# Altium PCB RP2040Breakout.PcbDoc
Units mm, origin at the board's own origin, x right, y up, seen from the top; angles counter-clockwise.
Board outline 60 x 60 mm, 2 copper layers (Top Layer, Bottom Layer), stack 1.57 mm thick; 62 components, 34 nets, 233 pads, 88 vias.
Unrouted connection lines stored in the file: 1.
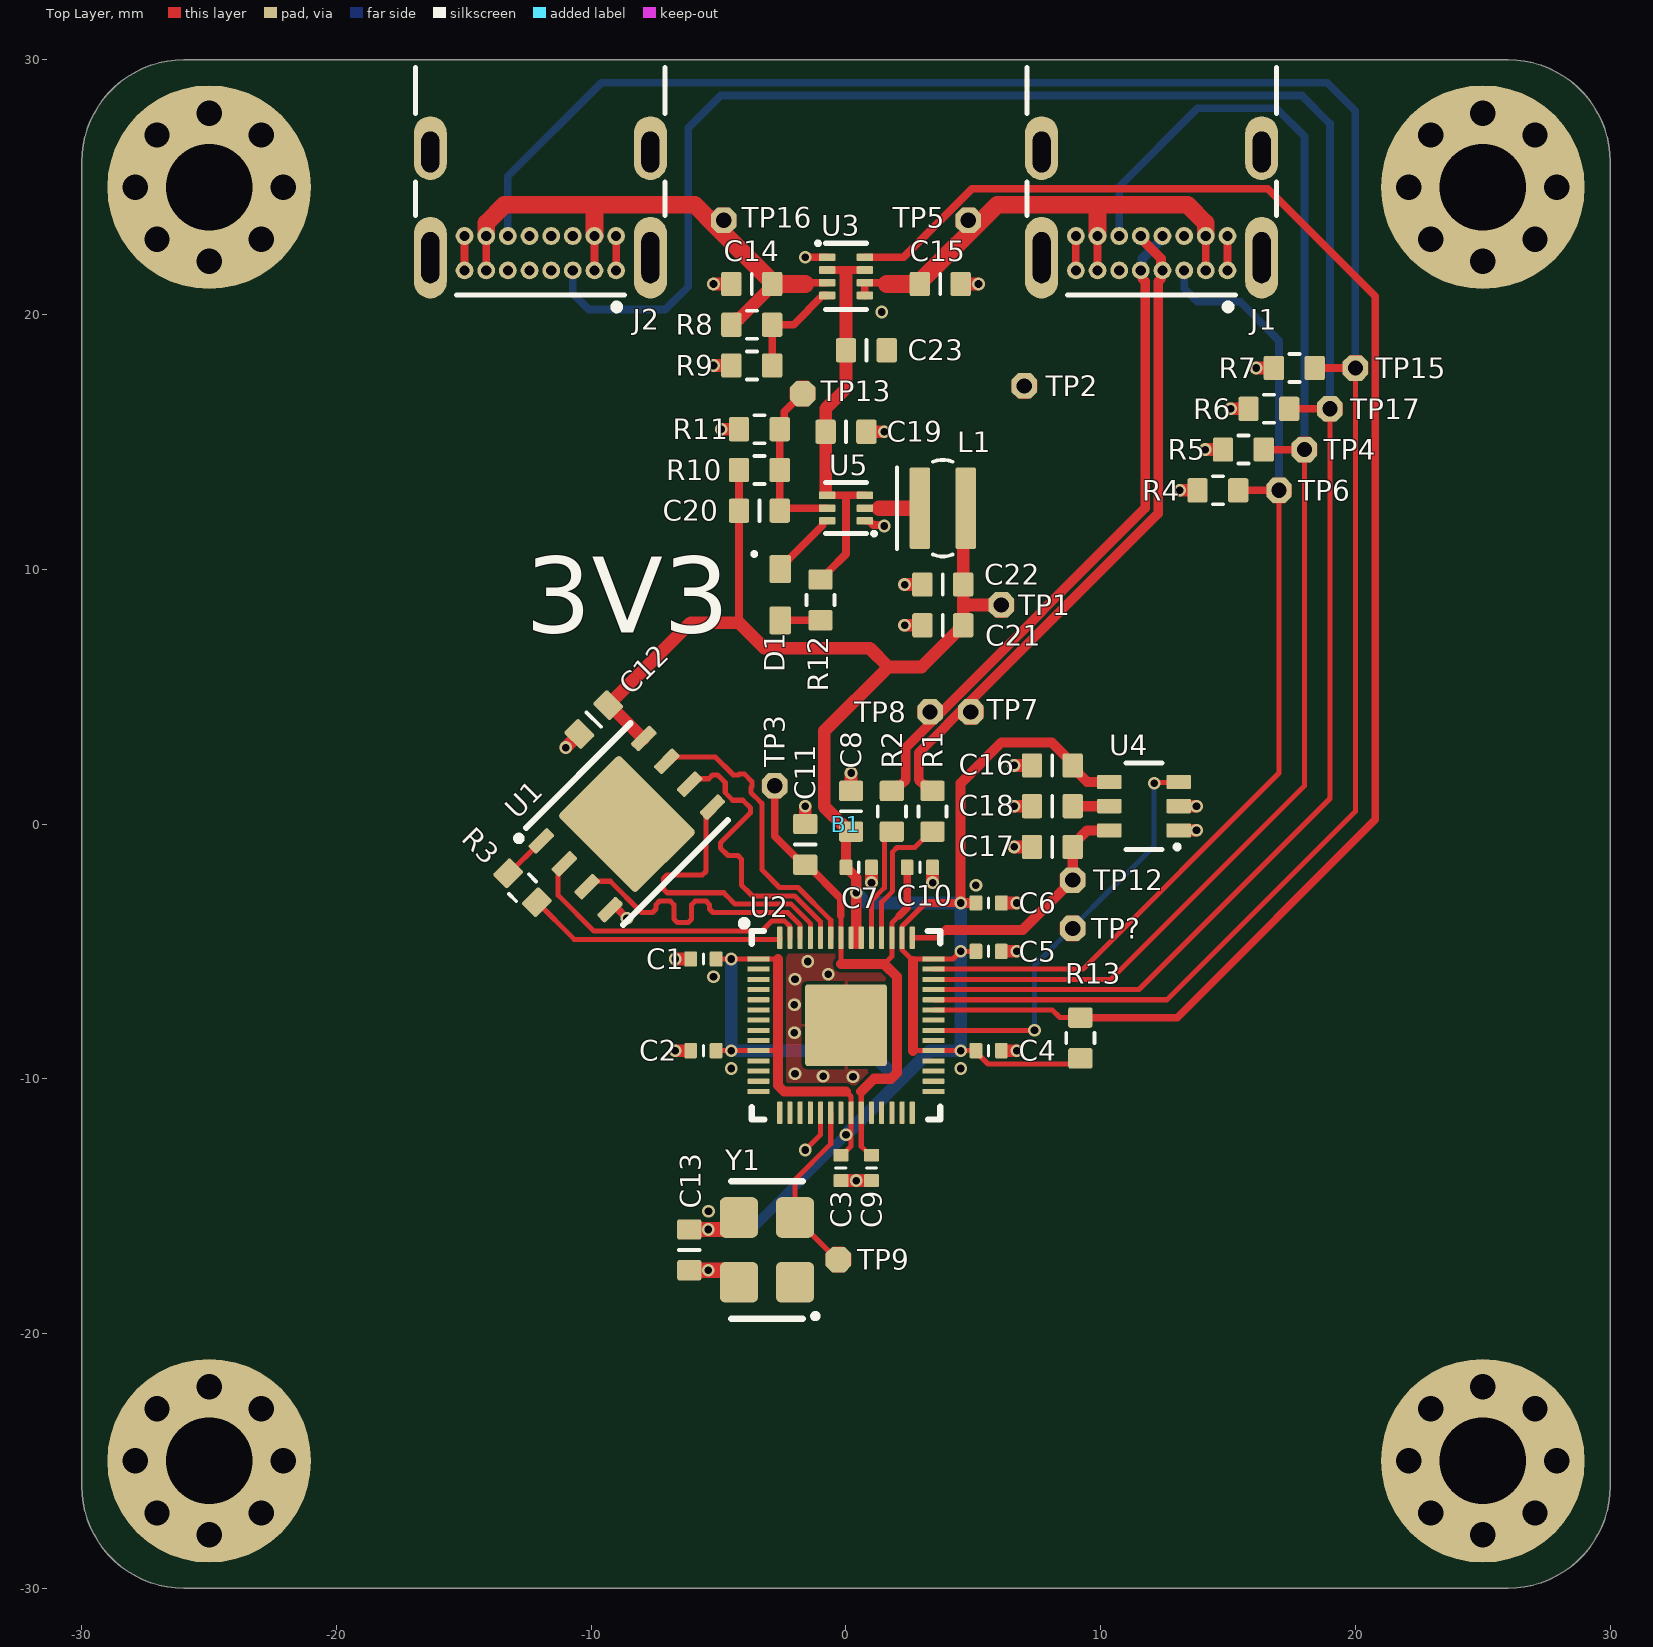
[diagram p0: Top Layer view]
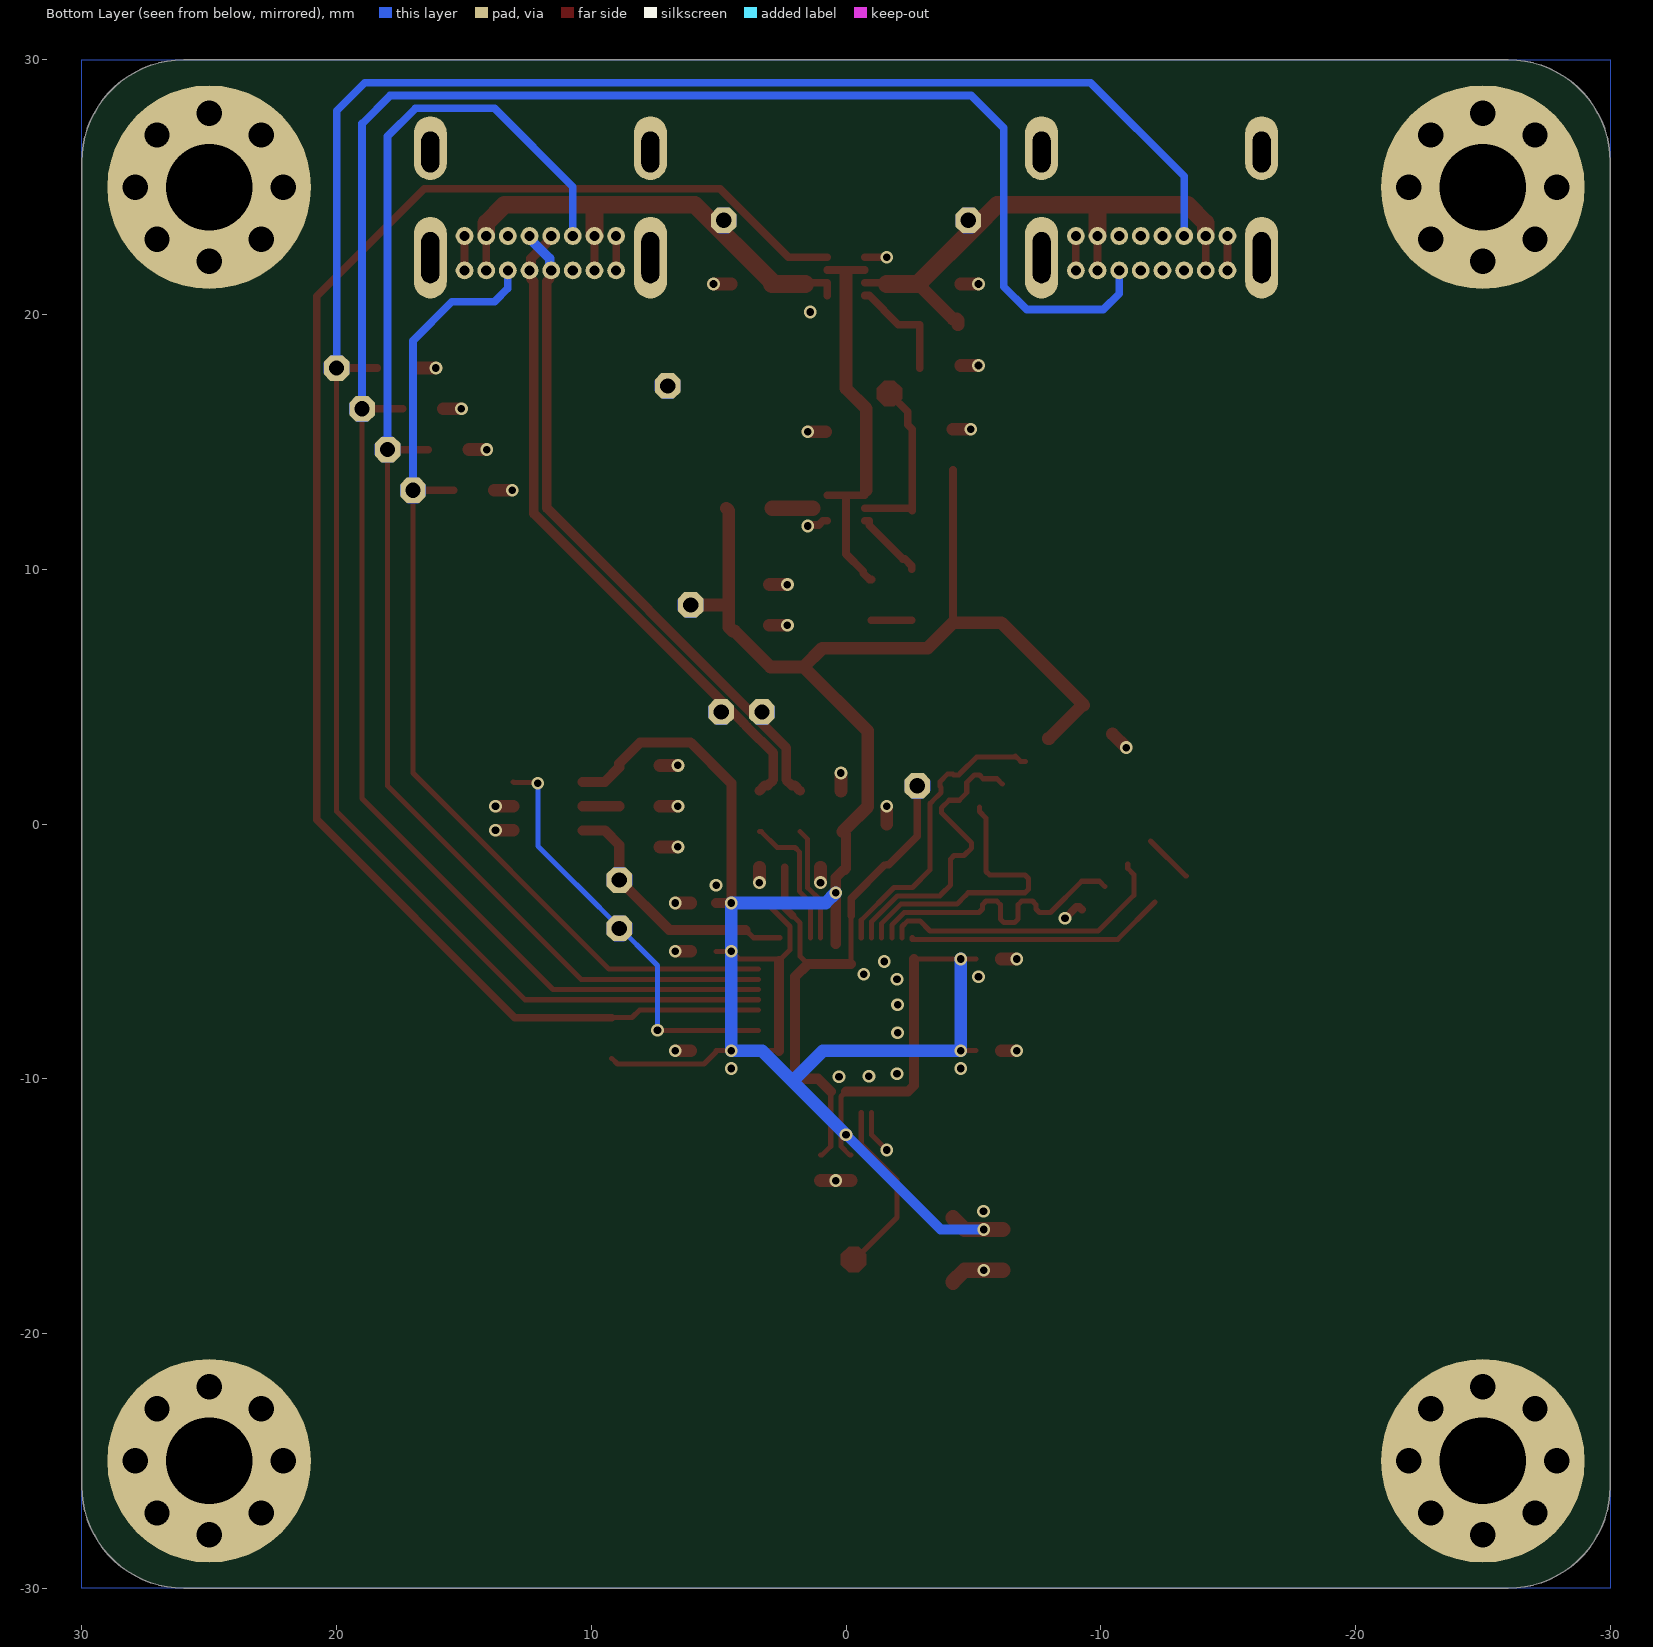
[diagram p1: Bottom Layer view, seen from below]
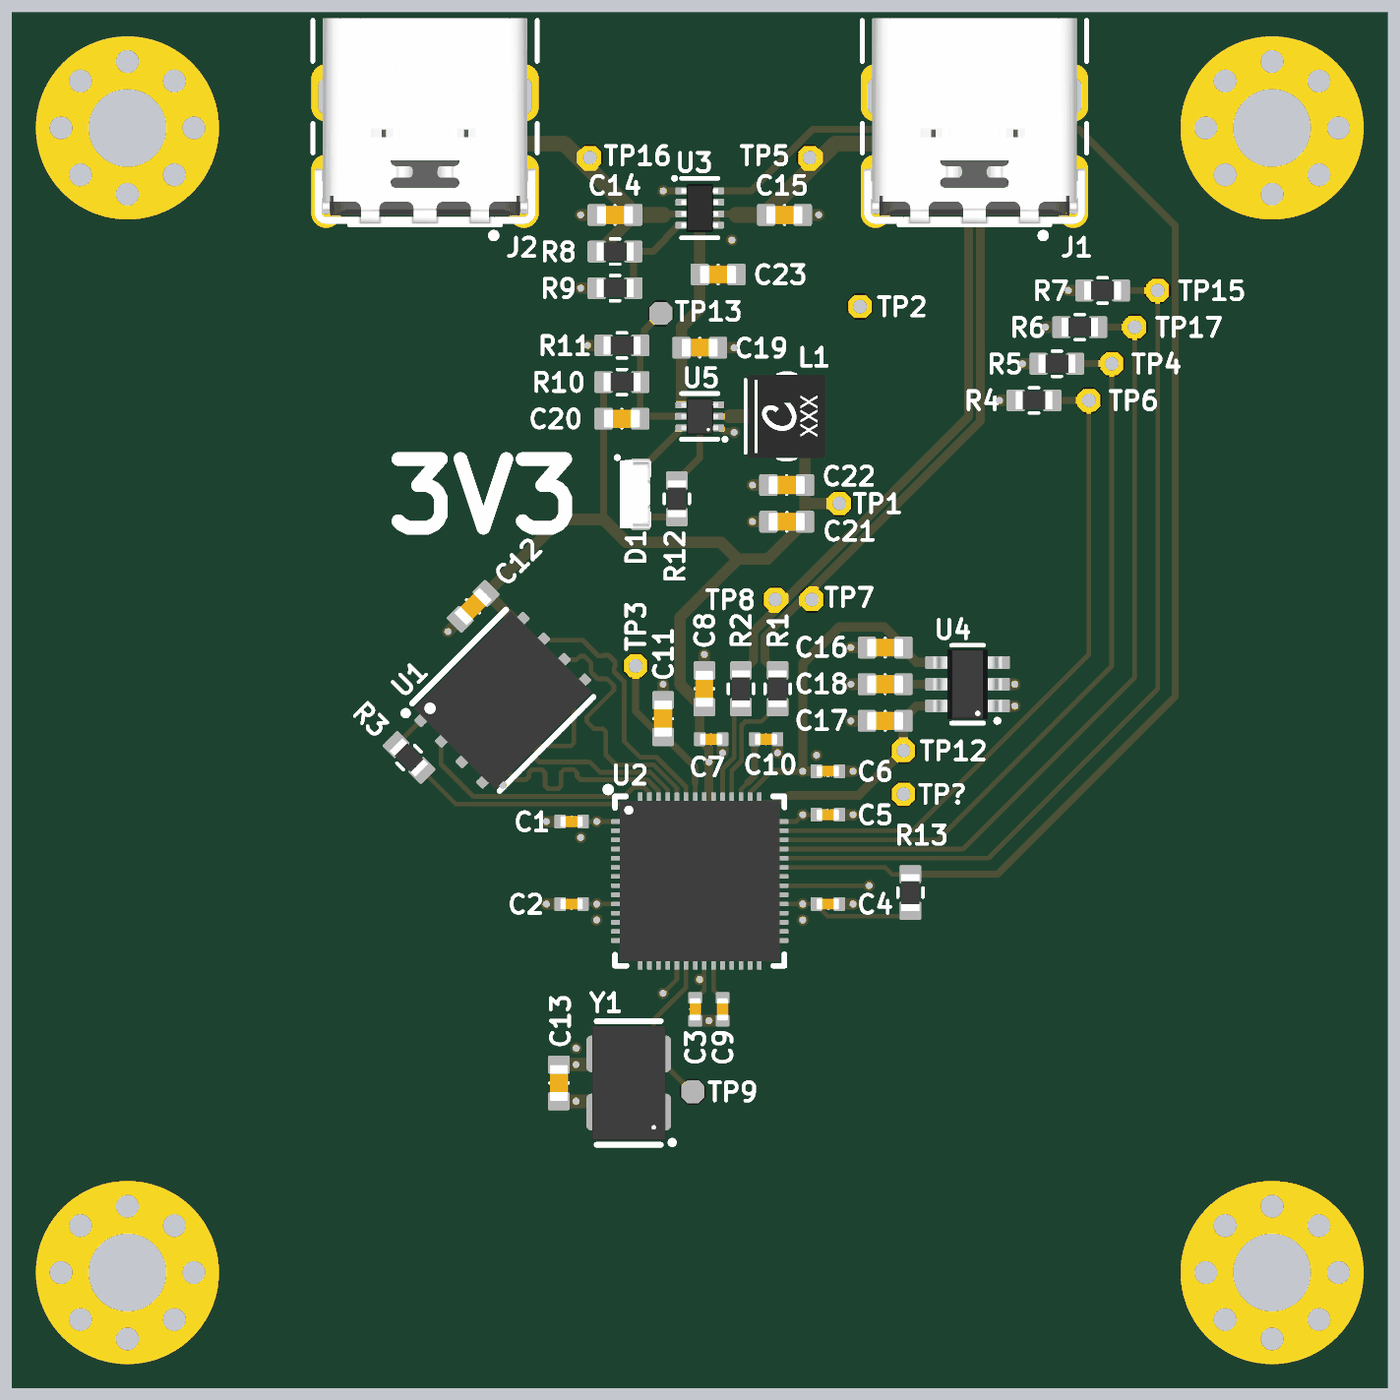
[diagram p2: 3D render of the assembled board from above, using the file's embedded part models]

## Layer stack, top to bottom
Top Solder: solder mask 0.0127, Solder Resist, Dk 3.8
Top Layer: signal copper 0.035
Dielectric 1: dielectric 1.5, FR-4, Dk 4.5
Bottom Layer: signal copper 0.035
Bottom Solder: solder mask 0.0127, Solder Resist, Dk 3.8

## Board outline
-30,-26 -30,26 cw(c-26,26) -26,30 26,30 cw(c26,26) 30,26 30,-26 cw(c26,-26) 26,-30 -26,-30 cw(c-26,-26)

## Design rules (kind name [scope] priority, off if disabled: settings)
BoardOutlineClearance [All] p1: gap=0.2 ignorepadtopadclearanceinfootprint=FALSE
Clearance [All] p1: gap=0.127 ignorepadtopadclearanceinfootprint=FALSE except(0.25: Arc-Hole Track-Hole SMDPad-Hole THPad-Hole Via-Hole Fill-Hole Poly-Hole Region-Hole Text-Hole)
ComponentClearance [NOT InComponent('B1') vs NOT InComponent('B1')] p1: gap=0.127 collisioncheckmode=3 verticalgap=0.127 showdistances=TRUE
DiffPairsRouting [All] p1: maxlimit=0.254 minlimit=0.127 mostfreqgap=0.127 toplayer_minwidth=0.127 toplayer_maxwidth=25.4 toplayer_prefwidth=0.127 bottomlayer_minwidth=0.127 bottomlayer_maxwidth=25.4 bottomlayer_prefwidth=0.127 maxuncoupledlength=12.7
DiffPairsRouting DiffPairsRouting_USB [InDifferentialPair('USBD')] p2: maxlimit=0.2 minlimit=0.2 mostfreqgap=0.2 toplayer_minwidth=0.766 toplayer_maxwidth=0.766 toplayer_prefwidth=0.766 bottomlayer_minwidth=0.766 bottomlayer_maxwidth=0.766 bottomlayer_prefwidth=0.766 impedanceprofiledriven=TRUE impedanceprofileid={7DB69605-737D-4C2B-A8A7-E868D9FD1BFF} impedanceprofilevalue=90.000000 maxuncoupledlength=12.7
Height [All] p1: minheight=0 maxheight=1816.048 prefheight=12.7
HoleSize [All] p1: absolutevalues=TRUE maxlimit=6.3 minlimit=0.3 maxpercent=80.000 minpercent=20.000
HoleToHoleClearance [All] p1: gap=0.25 allowstackedmicrovias=FALSE
MinimumAnnularRing [All] p1: minimumring=0.15
MinimumSolderMaskSliver [All] p1: minsoldermaskwidth=0
PlaneClearance [All] p1: clearance=0.127
PlaneConnect PlaneConnectPowerPads [InPadClass('PowerPads')] p1: planeconnectstyle=Direct reliefexpansion=0.508 reliefentries=4 reliefconductorwidth=0.254 reliefairgap=0.254
PlaneConnect [All] p2: pad.planeconnectstyle=Relief pad.reliefexpansion=0.3 pad.reliefentries=4 pad.reliefconductorwidth=0.127 pad.reliefairgap=0.127 via.planeconnectstyle=Direct via.reliefexpansion=0.3 via.reliefentries=4 via.reliefconductorwidth=0.127 via.reliefairgap=0.127
PolygonConnect PolygonConnectPowerPads [All vs (InPadClass('PowerPads'))] p1: connectstyle=Direct reliefconductorwidth=0.254 reliefentries=4 polygonreliefangle="90 Angle" airgapwidth=0.254
PolygonConnect [All] p2: thpad.connectstyle=Relief thpad.reliefconductorwidth=0.127 thpad.reliefentries=4 thpad.polygonreliefangle="90 Angle" thpad.airgapwidth=0.127 smdpad.connectstyle=Relief smdpad.reliefconductorwidth=0.127 smdpad.reliefentries=4 smdpad.polygonreliefangle="90 Angle" smdpad.airgapwidth=0.127 via.connectstyle=Direct via.reliefconductorwidth=0.127 via.reliefentries=4 via.polygonreliefangle="90 Angle" via.airgapwidth=0.127
RoutingVias [All] p1: holewidth=0.3 width=0.5 viastyle="Through Hole" minholewidth=0.3 minwidth=0.5 maxholewidth=0.6 maxwidth=6.6
SilkToSilkClearance [All] p1: silktosilkclearance=0
SilkToSolderMaskClearance [IsPad] p1: minsilkscreentomaskgap=0.127 clearancetoexposedcopper=TRUE
SolderMaskExpansion SolderMaskExpansion_Via [IsVia] p1: expansion=0.075 istentingtop=TRUE
SolderMaskExpansion [NOT IsVia] p2: expansion=0.075 istentingtop=FALSE
Width [All] p1: maxlimit=25.4 minlimit=0.127 preferedwidth=0.127 minimp=50.000000 maximp=50.000000 favimp=50.000000
20 further rules are at their usual default settings.

## Classes and differential pairs
differential pair RPD: +RPD_P -RPD_N
differential pair USBD: +USBD_P -USBD_N

## Components (designator, comment, footprint, x,y, rotation, side; value= is the part's Value field where it differs from the comment)
B1 "Board Outline Square" PCB_OUTLINE_SQUARE 0,0 r0 top locked
C1 "Capacitor - Ceramic - Generic" CAPACITOR_0402(1005)_GENERIC -5.6,-5.3 r0 top value=100nF
C2 "Capacitor - Ceramic - Generic" CAPACITOR_0402(1005)_GENERIC -5.6,-8.9 r0 top value=100nF
C3 "Capacitor - Ceramic - Generic" CAPACITOR_0402(1005)_GENERIC -0.2,-13.5 r90 top value=100nF
C4 "Capacitor - Ceramic - Generic" CAPACITOR_0402(1005)_GENERIC 5.6,-8.9 r180 top value=100nF
C5 "Capacitor - Ceramic - Generic" CAPACITOR_0402(1005)_GENERIC 5.6,-5 r180 top value=100nF
C6 "Capacitor - Ceramic - Generic" CAPACITOR_0402(1005)_GENERIC 5.6,-3.1 r180 top value=100nF
C7 "Capacitor - Ceramic - Generic" CAPACITOR_0402(1005)_GENERIC 0.5,-1.7 r180 top value=100nF
C8 "Capacitor - Ceramic - Generic" CAPACITOR_0603(1608)_GENERIC 0.2,0.5 r270 top value=1uF
C9 "Capacitor - Ceramic - Generic" CAPACITOR_0402(1005)_GENERIC 1,-13.5 r90 top value=100nF
C10 "Capacitor - Ceramic - Generic" CAPACITOR_0402(1005)_GENERIC 2.9,-1.7 r180 top value=100nF
C11 "Capacitor - Ceramic - Generic" CAPACITOR_0603(1608)_GENERIC -1.6,-0.8 r270 top value=1uF
C12 "Capacitor - Ceramic - Generic" CAPACITOR_0603(1608)_GENERIC -9.9,4.1 r225 top value=100nF
C13 "Capacitor - Ceramic - Generic" CAPACITOR_0603(1608)_GENERIC -6.152,-16.719 r270 top value=100nF
C14 "Capacitor - Ceramic - Generic" CAPACITOR_0603(1608)_GENERIC -3.7,21.2 r0 top value=1uF
C15 "Capacitor - Ceramic - Generic" CAPACITOR_0603(1608)_GENERIC 3.7,21.2 r180 top value=1uF
C16 "Capacitor - Ceramic - Generic" CAPACITOR_0603(1608)_GENERIC 8.1,2.3 r180 top value=100nF
C17 "Capacitor - Ceramic - Generic" CAPACITOR_0603(1608)_GENERIC 8.1,-0.9 r0 top value=1uF
C18 "Capacitor - Ceramic - Generic" CAPACITOR_0603(1608)_GENERIC 8.1,0.7 r0 top value=1uF
C19 "Capacitor - Ceramic - Generic" CAPACITOR_0603(1608)_GENERIC 0,15.4 r0 top value=4.7uF
C20 "Capacitor - Ceramic - Generic" CAPACITOR_0603(1608)_GENERIC -3.4,12.3 r180 top value=120pF
C21 "Capacitor - Ceramic - Generic" CAPACITOR_0603(1608)_GENERIC 3.8,7.8 r0 top value=10uF
C22 "Capacitor - Ceramic - Generic" CAPACITOR_0603(1608)_GENERIC 3.8,9.4 r0 top value=10uF
C23 "Capacitor - Ceramic - Generic" CAPACITOR_0603(1608)_GENERIC 0.8,18.6 r180 top value=10uF
D1 "155301BS73100" WL-SMSW_3014_WURTH -2.8,9 r270 top
J1 "2137160001" CONN_PORT_USB-C_MOLEX-2137160001 12,25.3 r180 top
J2 "2137160001" CONN_PORT_USB-C_MOLEX-2137160001 -12,25.3 r180 top
L1 "Inductor - Ferrite Core - Generic" XGL3512_COILCRAFT 3.8,12.4 r90 top value=1uH
R1 "Resistor - Fixed - Generic" RESISTOR_0603(1608)_GENERIC 3.4,0.5 r270 top value=27R
R2 "Resistor - Fixed - Generic" RESISTOR_0603(1608)_GENERIC 1.8,0.5 r270 top value=27R
R3 "Resistor - Fixed - Generic" RESISTOR_0603(1608)_GENERIC -12.7,-2.5 r315 top value=1kR
R4 "Resistor - Fixed - Generic" RESISTOR_0603(1608)_GENERIC 14.6,13.1 r180 top value=5.1kR
R5 "Resistor - Fixed - Generic" RESISTOR_0603(1608)_GENERIC 15.6,14.7 r180 top value=5.1kR
R6 "Resistor - Fixed - Generic" RESISTOR_0603(1608)_GENERIC 16.6,16.3 r180 top value=5.1kR
R7 "Resistor - Fixed - Generic" RESISTOR_0603(1608)_GENERIC 17.6,17.9 r180 top value=5.1kR
R8 "Resistor - Fixed - Generic" RESISTOR_0603(1608)_GENERIC -3.7,19.6 r0 top value=36kR
R9 "Resistor - Fixed - Generic" RESISTOR_0603(1608)_GENERIC -3.7,18 r0 top value=10kR
R10 "Resistor - Fixed - Generic" RESISTOR_0603(1608)_GENERIC -3.4,13.9 r0 top value=450kR
R11 "Resistor - Fixed - Generic" RESISTOR_0603(1608)_GENERIC -3.4,15.5 r180 top value=100kR
R12 "Resistor - Fixed - Generic" RESISTOR_0603(1608)_GENERIC -1,8.8 r90 top value=2.2kR
R13 "Resistor - Fixed - Generic" RESISTOR_0603(1608)_GENERIC 9.2,-8.4 r270 top value=10kR
TP1 "Test Point - THT" TESTPOINT_THT_OCTAGON 6.1,8.6 r90 top
TP2 "Test Point - THT" TESTPOINT_THT_OCTAGON 7,17.2 r90 top
TP3 "Test Point - THT" TESTPOINT_THT_OCTAGON -2.8,1.5 r90 top
TP4 "Test Point - THT" TESTPOINT_THT_OCTAGON 18,14.7 r90 top
TP5 "Test Point - THT" TESTPOINT_THT_OCTAGON 4.8,23.7 r90 top
TP6 "Test Point - THT" TESTPOINT_THT_OCTAGON 17,13.1 r90 top
TP7 "Test Point - THT" TESTPOINT_THT_OCTAGON 4.9,4.4 r90 top
TP8 "Test Point - THT" TESTPOINT_THT_OCTAGON 3.3,4.4 r90 top
TP9 "Test Point - SMT" TESTPOINT_SMT_OCTAGON -0.3,-17.1 r90 top
TP12 "Test Point - THT" TESTPOINT_THT_OCTAGON 8.9,-2.2 r90 top
TP13 "Test Point - SMT" TESTPOINT_SMT_OCTAGON -1.7,16.9 r90 top
TP15 "Test Point - THT" TESTPOINT_THT_OCTAGON 20,17.9 r90 top
TP16 "Test Point - THT" TESTPOINT_THT_OCTAGON -4.8,23.7 r90 top
TP17 "Test Point - THT" TESTPOINT_THT_OCTAGON 19,16.3 r90 top
TP? "Test Point - THT" TESTPOINT_THT_OCTAGON 8.9,-4.1 r90 top
U1 "W25Q128JV" WSON-8(6x5mm)_WINBOND -8.6,0 r45 top
U2 "SC0914 (RP2040)" QFN-56(7x7)_RASPBERRYPI 0,-7.9 r0 top
U3 "TPS2116" SOT-583(DRL0008A)_TI 0,21.5 r0 top
U4 "REF35205QDBV" SOT23-6(DBV0006A)_TI 11.7,0.7 r180 top
U5 "TPS62A01" SOT-563(DRL0006A)_TI 0,12.4 r180 top
Y1 "SIT1602BC-31-33N-12.000000" 4-SMD(4-QFN)_SiTime -3.104,-16.719 r180 top

## Footprints (in the part's own frame and the unit in brackets; to place one, negate y for a bottom-side part, rotate by r counter-clockwise, add the part's x,y. Pads: shape width x height; smd on the part's side, far side on the other; paste and mask are expansions set on the pad)
4-SMD(4-QFN)_SiTime [mm]
  rrect30% 1.5x1.6 smd: 1(-1.1,1.27) 2(1.1,1.27) 3(-1.1,-1.27) 4(1.1,-1.27)
  silkscreen extent -1.95,-2.7 1.4,2.7, body extent -1.6,-2.5 1.6,2.5, height 0.83
CAPACITOR_0402(1005)_GENERIC [mm]
  rrect20% 0.5x0.6 smd: 1(-0.5,0) 2(0.5,0)
  silkscreen extent 0,-0.2 0,0.2, body extent -0.5,-0.25 0.5,0.25, height 0.55
CAPACITOR_0603(1608)_GENERIC [mm]
  rrect20% 0.8x0.95 smd: 1(-0.8,0) 2(0.8,0)
  silkscreen extent 0,-0.4 0,0.4, body extent -0.8,-0.4 0.8,0.4, height 0.9
CONN_PORT_USB-C_MOLEX-2137160001 [mm]
  round 0.7 hole 0.4 paste-1000 mask+0: A1(-2.975,3.565) A4(-2.125,3.565) A5(-1.275,3.565) A6(-0.425,3.565) A7(0.425,3.565) A8(1.275,3.565) A9(2.125,3.565) A12(2.975,3.565) B1(2.975,2.215) B4(2.125,2.215) B5(1.275,2.215) B6(0.425,2.215) B7(-0.425,2.215) B8(-1.275,2.215) B9(-2.125,2.215) B12(-2.975,2.215)
  rrect100% 1.3x2.5 smd paste-1000 mask+0: M1(-4.32,-1.235) M3(4.32,-1.235)
  rrect100% 1.3x2.5 smd far side paste-1000 mask+0: M1(-4.32,-1.235) M3(4.32,-1.235)
  rrect100% 0.7x1.6 hole 1.6 slot 0.7 at 0 deg paste-1000 mask+0: M1(-4.32,-1.085) M3(4.32,-1.085)
  rrect100% 1.3x3.2 hole 0.7 slot 2 at 90 deg paste-1000 mask+0: M2(-4.32,3.065) M4(4.32,3.065)
  Top Layer lines w0.3: 2.975,3.565 2.975,2.215 ; 2.125,3.565 2.125,2.215 ; -2.125,3.565 -2.125,2.215 ; -2.975,3.565 -2.975,2.215
  silkscreen extent -4.9,-4.4 4.9,5.12, body extent -5.07,-4.63 5.07,4.76, height 0.25
PCB_OUTLINE_SQUARE [mm]
  round 8 hole 3.4: 1(-25,-25) 1(-25,25) 1(25,-25) 1(25,25)
QFN-56(7x7)_RASPBERRYPI [mm]
  rrect30% 0.875x0.2 smd mask+0: 1(-3.435,2.6) 2(-3.435,2.2) 3(-3.435,1.8) 4(-3.435,1.4) 5(-3.435,1) 6(-3.435,0.6) 7(-3.435,0.2) 8(-3.435,-0.2) 9(-3.435,-0.6) 10(-3.435,-1) 11(-3.435,-1.4) 12(-3.435,-1.8) 13(-3.435,-2.2) 14(-3.435,-2.6) 29(3.435,-2.6) 30(3.435,-2.2) 31(3.435,-1.8) 32(3.435,-1.4) 33(3.435,-1) 34(3.435,-0.6) 35(3.435,-0.2) 36(3.435,0.2) 37(3.435,0.6) 38(3.435,1) 39(3.435,1.4) 40(3.435,1.8) 41(3.435,2.2) 42(3.435,2.6)
  rrect30% 0.2x0.875 smd mask+0: 15(-2.6,-3.435) 16(-2.2,-3.435) 17(-1.8,-3.435) 18(-1.4,-3.435) 19(-1,-3.435) 20(-0.6,-3.435) 21(-0.2,-3.435) 22(0.2,-3.435) 23(0.6,-3.435) 24(1,-3.435) 25(1.4,-3.435) 26(1.8,-3.435) 27(2.2,-3.435) 28(2.6,-3.435) 43(2.6,3.435) 44(2.2,3.435) 45(1.8,3.435) 46(1.4,3.435) 47(1,3.435) 48(0.6,3.435) 49(0.2,3.435) 50(-0.2,3.435) 51(-0.6,3.435) 52(-1,3.435) 53(-1.4,3.435) 54(-1.8,3.435) 55(-2.2,3.435) 56(-2.6,3.435)
  rrect5% 3.2x3.2 smd paste-0.57: 57(0,0)
  silkscreen extent -4.05,-3.7 3.7,4.05, body extent -3.5,-3.5 3.5,3.5, height 0.9
RESISTOR_0603(1608)_GENERIC [mm]
  rrect20% 0.8x0.95 smd: 1(-0.8,0) 2(0.8,0)
  silkscreen extent -0.2,-0.55 0.2,0.55, body extent -0.8,-0.4 0.8,0.4, height 0.55
SOT23-6(DBV0006A)_TI [mm]
  rrect20% 0.972x0.558 smd: 1(-1.362,0.95) 2(-1.362,0) 3(-1.362,-0.95) 4(1.362,-0.95) 5(1.362,0) 6(1.362,0.95)
  silkscreen extent -1.35,-1.7 0.7,1.7, body extent -1.5,-1.52 1.5,1.52, height 1.45
SOT-563(DRL0006A)_TI [mm]
  rrect30% 0.65x0.3 smd mask+0.025: 1(-0.74,0.5) 2(-0.74,0) 3(-0.74,-0.5) 4(0.74,-0.5) 5(0.74,0) 6(0.74,0.5)
  silkscreen extent -1.15,-1 0.8,1.05, body extent -0.8,-0.8 0.8,0.8, height 0.6
SOT-583(DRL0008A)_TI [mm]
  rrect30% 0.65x0.3 smd: 1(-0.74,0.75) 2(-0.74,0.25) 3(-0.74,-0.25) 4(-0.74,-0.75) 5(0.74,-0.75) 6(0.74,-0.25) 7(0.74,0.25) 8(0.74,0.75)
  silkscreen extent -1.15,-1.3 0.8,1.35, body extent -0.8,-1.05 0.8,1.05, height 0.6
TESTPOINT_SMT_OCTAGON [mm]
  oct 1x1 smd: 1(0,0)
  Top Layer region: -0.2,-0.5 -0.5,-0.2 -0.5,0.2 -0.2,0.5 0.2,0.5 0.5,0.2 0.5,-0.2 0.2,-0.5
TESTPOINT_THT_OCTAGON [mm]
  oct 1x1 hole 0.6: 1(0,0)
  Top Layer region: -0.2,-0.5 -0.5,-0.2 -0.5,0.2 -0.2,0.5 0.2,0.5 0.5,0.2 0.5,-0.2 0.2,-0.5
  Bottom Layer region: -0.2,-0.5 -0.5,-0.2 -0.5,0.2 -0.2,0.5 0.2,0.5 0.5,0.2 0.5,-0.2 0.2,-0.5
WL-SMSW_3014_WURTH [mm]
  rrect20% 1.1x0.85 smd: 1(-1.005,0.218) 2(1.005,0.218)
  silkscreen extent -1.65,-0.85 -1.55,-0.75, body extent -1.5,-0.69 1.5,0.69, height 1.55
WSON-8(6x5mm)_WINBOND [mm]
  rrect30% 1.05x0.45 smd: 1(-2.845,1.905) 2(-2.845,0.635) 3(-2.845,-0.635) 4(-2.845,-1.905) 5(2.845,-1.905) 6(2.845,-0.635) 7(2.845,0.635) 8(2.845,1.905)
  rrect8% 3.4x4.3 smd paste-3: 9(0,0)
  silkscreen extent -3.5,-2.7 2.9,2.7, body extent -3,-2.5 3,2.5, height 0.8
XGL3512_COILCRAFT [mm]
  rrect20% 3.2x0.81 smd: 1(0,0.9) 2(0,-0.9)
  silkscreen extent -1.9,-0.38 1.9,1.8, body extent -1.83,-1.68 1.83,1.68, height 1.2

## Part data
B1: library part Board_Outline_Square
C1 C2 C3 C4 C5 C6 C7 C9 C10: library part CAP-CER_100NF_50V_10%_X7R_0402(1005), "100nF ±10% 50V Ceramic Capacitor X7R 0402(1005 Metric)", Manufacturer 1="Murata Electronics", Manufacturer Lifecycle 1=Active, Manufacturer Part Number 1=GRM155R71H104KE14J, Manufacturer Part Number 2=GRM155C71H104KE19D, Manufacturer Part Number 3=GRM155R71H104KE14D, Package/Case Imperial=0402, Package/Case Metric=1005, Temperature Coefficient=X7R, Tolerance=10%, Voltage - Rated=50V, Full Item="Ceramic Capacitor", Item=CAP-CER, Manufacturer 2="Murata Electronics", Manufacturer 3="Murata Electronics", Manufacturer Lifecycle 2=Active, Manufacturer Lifecycle 3=Active, Mounting Type=SMT, Name=CAP-CER_100NF_50V_10%_X7R_0402(1005)
C8 C11 C14 C15 C17 C18: library part CAP-CER_1UF_25V_20%_X7R_0603(1608), "1uF ±20% 25V Ceramic Capacitor X7R 0603(1608 Metric)", Manufacturer 1="Murata Electronics", Manufacturer Lifecycle 1=Active, Manufacturer Part Number 1=GCM188R71E105KA64D, Manufacturer Part Number 2=GCM188R71E105KA64J, Manufacturer Part Number 3=GCM188R71E105MA64D, Package/Case Imperial=0603, Package/Case Metric=1608, Temperature Coefficient=X7R, Tolerance=20%, Voltage - Rated=25V, Full Item="Ceramic Capacitor", Item=CAP-CER, Manufacturer 2="Murata Electronics", Manufacturer 3="Murata Electronics", Manufacturer Lifecycle 2=Active, Manufacturer Lifecycle 3=Active, Mounting Type=SMT, Name=CAP-CER_1UF_25V_20%_X7R_0603(1608)
C12 C13 C16: library part CAP-CER_100NF_100V_20%_X7R_0603(1608), "100nF ±20% 100V Ceramic Capacitor X7R 0603(1608 Metric)", Manufacturer 1="Murata Electronics", Manufacturer Lifecycle 1=Active, Manufacturer Part Number 1=GRM188R72A104KA35D, Manufacturer Part Number 2=GRM188R72A104KA35J, Manufacturer Part Number 3=GRM188R72A104MA35D, Package/Case Imperial=0603, Package/Case Metric=1608, Temperature Coefficient=X7R, Tolerance=20%, Voltage - Rated=100V, Full Item="Ceramic Capacitor", Item=CAP-CER, Manufacturer 2="Murata Electronics", Manufacturer 3="Murata Electronics", Manufacturer Lifecycle 2=Active, Manufacturer Lifecycle 3=Active, Mounting Type=SMT, Name=CAP-CER_100NF_100V_20%_X7R_0603(1608)
C19: library part CAP-CER_4.7UF_25V_20%_X6S_0603(1608), "4.7uF ±20% 25V Ceramic Capacitor X6S 0603(1608 Metric)", Manufacturer 1="Murata Electronics", Manufacturer Lifecycle 1=Active, Manufacturer Part Number 1=GRM188C81E475KE11D, Manufacturer Part Number 2=GRM188C81E475ME11D, Manufacturer Part Number 3=GRM188C81E475KE11J, Package/Case Imperial=0603, Package/Case Metric=1608, Temperature Coefficient=X6S, Tolerance=20%, Voltage - Rated=25V, Full Item="Ceramic Capacitor", Item=CAP-CER, Manufacturer 2="Murata Electronics", Manufacturer 3="Murata Electronics", Manufacturer Lifecycle 2=Active, Manufacturer Lifecycle 3=Active, Mounting Type=SMT, Name=CAP-CER_4.7UF_25V_20%_X6S_0603(1608)
C20: library part CAP-CER_120PF_100V_5%_C0G/NP0_0603(1608), "120pF ±5% 100V Ceramic Capacitor C0G/NP0 0603(1608 Metric)", Manufacturer 1="Murata Electronics", Manufacturer Lifecycle 1=Active, Manufacturer Part Number 1=GCM1885C2A121FA16D, Manufacturer Part Number 2=GCM1885C2A121JA16D, Manufacturer Part Number 3=GCM1885C2A121FA16J, Package/Case Imperial=0603, Package/Case Metric=1608, Temperature Coefficient=C0G/NP0, Tolerance=5%, Voltage - Rated=100V, Full Item="Ceramic Capacitor", Item=CAP-CER, Manufacturer 2="Murata Electronics", Manufacturer 3="Murata Electronics", Manufacturer Lifecycle 2=Active, Manufacturer Lifecycle 3=Active, Mounting Type=SMT, Name=CAP-CER_120PF_100V_5%_C0G/NP0_0603(1608)
C21 C22 C23: library part CAP-CER_10UF_25V_20%_X5R_0603(1608), "10uF ±20% 25V Ceramic Capacitor X5R 0603(1608 Metric)", Manufacturer 1="Murata Electronics", Manufacturer Lifecycle 1=Active, Manufacturer Part Number 1=GRM188R61E106KA73J, Manufacturer Part Number 2=GRM188R61E106MA73D, Manufacturer Part Number 3=GRM188R61E106MA73J, Package/Case Imperial=0603, Package/Case Metric=1608, Temperature Coefficient=X5R, Tolerance=20%, Voltage - Rated=25V, Full Item="Ceramic Capacitor", Item=CAP-CER, Manufacturer 2="Murata Electronics", Manufacturer 3="Murata Electronics", Manufacturer Lifecycle 2=Active, Manufacturer Lifecycle 3=Active, Mounting Type=SMT, Name=CAP-CER_10UF_25V_20%_X5R_0603(1608)
D1: library part "Diode - LED - Single LED - Wurth 155301BS73100", Forward Voltage=3.2V
J1 J2: library part "Connector - Ports - USB C - Molex 2137160001", Supplier Part Number 1=538-213716-0001, Supplier 1=Mouser, Supplier 2=Newark, Supplier 3=Avnet, Supplier 4=Farnell, Supplier Part Number 2=13AJ2447, Supplier Part Number 3=13AJ2447, Supplier Part Number 4=3648629
L1: library part IND-FXD_1UH_20%_32.2MR_4.5A_NONSTANDARD, "Fixed Inductor 1uH 20% 32.2mR 4.9A Rated 4.5A Saturation Nonstandard 3.5mmx3.2mm", Current - Rating=4.9A, Current - Saturation=4.5A, Manufacturer 1=Coilcraft, Manufacturer Lifecycle 1=Active, Manufacturer Part Number 1=XGL3512-102MEC, Package/Case Manufacturer=3.5mmx3.2mm, Package/Case Standard=Nonstandard, Tolerance=20%, DCR=32.2mR, Full Item="Fixed Inductor", Item=IND-FXD, Mounting Type=SMT, Name=IND-FXD_1UH_20%_32.2MR_4.5A_NONSTANDARD, Type=Molded
R1 R2: library part RES-FXD_27R_1%_100MW_100PPM/°C_0603(1608), "27R ±1% 100mW Chip Resistor 100ppm/°C 0603(1608 Metric)", Manufacturer 1="Bourns Inc.", Manufacturer Lifecycle 1=Active, Manufacturer Part Number 1=CR0603-FX-27R0ELF, Manufacturer Part Number 2=CMP0603AFX-27R0ELF, Manufacturer Part Number 3=CMP0603-FX-27R0ELF, Package/Case Imperial=0603, Package/Case Metric=1608, Power=100mW, Temperature Coefficient=100ppm/°C, Tolerance=1%, Full Item="Chip Resistor", Item=RES-FXD, Manufacturer 2="Bourns Inc.", Manufacturer 3="Bourns Inc.", Manufacturer Lifecycle 2=Active, Manufacturer Lifecycle 3=Active, Mounting Type=SMT, Name=RES-FXD_27R_1%_100MW_100PPM/°C_0603(1608)
R3: library part RES-FXD_1KR_1%_100MW_100PPM/°C_0603(1608), "1kR ±1% 100mW Chip Resistor 100ppm/°C 0603(1608 Metric)", Manufacturer 1="Bourns Inc.", Manufacturer Lifecycle 1=Active, Manufacturer Part Number 1=CR0603-FX-1001ELF, Manufacturer Part Number 2=CR0603AFX-1001ELF, Manufacturer Part Number 3=CRT0603-FY-1001ELF, Package/Case Imperial=0603, Package/Case Metric=1608, Power=100mW, Temperature Coefficient=100ppm/°C, Tolerance=1%, Full Item="Chip Resistor", Item=RES-FXD, Manufacturer 2="Bourns Inc.", Manufacturer 3="Bourns Inc.", Manufacturer Lifecycle 2=Active, Manufacturer Lifecycle 3=Active, Mounting Type=SMT, Name=RES-FXD_1KR_1%_100MW_100PPM/°C_0603(1608)
R4 R5 R6 R7: library part RES-FXD_5.1KR_1%_100MW_100PPM/°C_0603(1608), "5.1kR ±1% 100mW Chip Resistor 100ppm/°C 0603(1608 Metric)", Manufacturer 1="Bourns Inc.", Manufacturer Lifecycle 1=Active, Manufacturer Part Number 1=CR0603-FX-5101ELF, Manufacturer Part Number 2=CR0603AFX-5101EAS, Package/Case Imperial=0603, Package/Case Metric=1608, Power=100mW, Temperature Coefficient=100ppm/°C, Tolerance=1%, Full Item="Chip Resistor", Item=RES-FXD, Manufacturer 2="Bourns Inc.", Manufacturer Lifecycle 2=Active, Mounting Type=SMT, Name=RES-FXD_5.1KR_1%_100MW_100PPM/°C_0603(1608)
R8: library part RES-FXD_36KR_1%_100MW_100PPM/°C_0603(1608), "36kR ±1% 100mW Chip Resistor 100ppm/°C 0603(1608 Metric)", Manufacturer 1="Bourns Inc.", Manufacturer Lifecycle 1=Active, Manufacturer Part Number 1=CR0603-FX-3602ELF, Package/Case Imperial=0603, Package/Case Metric=1608, Power=100mW, Temperature Coefficient=100ppm/°C, Tolerance=1%, Full Item="Chip Resistor", Item=RES-FXD, Mounting Type=SMT, Name=RES-FXD_36KR_1%_100MW_100PPM/°C_0603(1608)
R9 R13: library part RES-FXD_10KR_1%_100MW_100PPM/°C_0603(1608), "10kR ±1% 100mW Chip Resistor 100ppm/°C 0603(1608 Metric)", Manufacturer 1="Bourns Inc.", Manufacturer Lifecycle 1=Active, Manufacturer Part Number 1=CR0603-FX-1002ELF, Manufacturer Part Number 2=CR0603AFX-1002EAS, Manufacturer Part Number 3=CMP0603-FX-1002ELF, Package/Case Imperial=0603, Package/Case Metric=1608, Power=100mW, Temperature Coefficient=100ppm/°C, Tolerance=1%, Full Item="Chip Resistor", Item=RES-FXD, Manufacturer 2="Bourns Inc.", Manufacturer 3="Bourns Inc.", Manufacturer Lifecycle 2=Active, Manufacturer Lifecycle 3=Active, Mounting Type=SMT, Name=RES-FXD_10KR_1%_100MW_100PPM/°C_0603(1608)
R10: library part RES-FXD_450KR_1%_100MW_100PPM/°C_0603(1608), "450kR ±1% 100mW Chip Resistor 100ppm/°C 0603(1608 Metric)", Manufacturer 1="Bourns Inc.", Manufacturer Lifecycle 1=Active, Manufacturer Part Number 1=CR0603-FX-4533ELF, Package/Case Imperial=0603, Package/Case Metric=1608, Power=100mW, Temperature Coefficient=100ppm/°C, Tolerance=1%, Full Item="Chip Resistor", Item=RES-FXD, Mounting Type=SMT, Name=RES-FXD_450KR_1%_100MW_100PPM/°C_0603(1608)
R11: library part RES-FXD_100KR_1%_100MW_100PPM/°C_0603(1608), "100kR ±1% 100mW Chip Resistor 100ppm/°C 0603(1608 Metric)", Manufacturer 1="Bourns Inc.", Manufacturer Lifecycle 1=Active, Manufacturer Part Number 1=CR0603-FX-1003ELF, Manufacturer Part Number 2=CR0603AFX-1003EAS, Manufacturer Part Number 3=CMP0603AFX-1003ELF, Package/Case Imperial=0603, Package/Case Metric=1608, Power=100mW, Temperature Coefficient=100ppm/°C, Tolerance=1%, Full Item="Chip Resistor", Item=RES-FXD, Manufacturer 2="Bourns Inc.", Manufacturer 3="Bourns Inc.", Manufacturer Lifecycle 2=Active, Manufacturer Lifecycle 3=Active, Mounting Type=SMT, Name=RES-FXD_100KR_1%_100MW_100PPM/°C_0603(1608)
R12: library part RES-FXD_2.2KR_1%_100MW_100PPM/°C_0603(1608), "2.2kR ±1% 100mW Chip Resistor 100ppm/°C 0603(1608 Metric)", Manufacturer 1="Bourns Inc.", Manufacturer Lifecycle 1=Active, Manufacturer Part Number 1=CR0603-FX-2201ELF, Manufacturer Part Number 2=CMP0603QFX-2201ELF, Package/Case Imperial=0603, Package/Case Metric=1608, Power=100mW, Temperature Coefficient=100ppm/°C, Tolerance=1%, Full Item="Chip Resistor", Item=RES-FXD, Manufacturer 2="Bourns Inc.", Manufacturer Lifecycle 2=Active, Mounting Type=SMT, Name=RES-FXD_2.2KR_1%_100MW_100PPM/°C_0603(1608)
U1: library part "IC - Memory - Non-Volatile - WinBond W25Q128JV", Supplier Part Number 1=W25Q128JVPIQ-ND, Supplier 1=Digi-Key, Supplier 2="Arrow Electronics", Supplier 3=Digi-Key, Supplier 4=Digi-Key, Supplier Part Number 2="W25Q128JVPIQ TR", Supplier Part Number 3=W25Q128JVPIQCT-ND, Supplier Part Number 4=W25Q128JVPIQDKR-ND
U2: library part "Integrated Circuit - Microcontroller - Raspberry Pi RP2040", Supplier Part Number 1=2648-SC0914(7)CT-ND, Supplier 1=Digi-Key, Supplier 2=Digi-Key, Supplier 3=Mouser, Supplier 4=Digi-Key, Supplier 5=Digi-Key, Supplier 6=Mouser, Supplier Part Number 2=2648-SC0914(7)DKR-ND, Supplier Part Number 3=358-SC09147, Supplier Part Number 4=2648-SC0914(13)CT-ND, Supplier Part Number 5=2648-SC0914(13)DKR-ND, Supplier Part Number 6=358-SC091413
U3: library part "IC - Power Management - Mux - TI TPS2116", Supplier Part Number 1=595-TPS2116DRLR, Supplier 1=Mouser, Supplier 2="Texas Instruments", Supplier 3=Digi-Key, Supplier 4=Digi-Key, Supplier Part Number 2=TPS2116DRLR, Supplier Part Number 3=296-TPS2116DRLRCT-ND, Supplier Part Number 4=296-TPS2116DRLRDKR-ND
U4: library part "IC - Power Management - Voltage Reference - TI REF35205"
U5: library part "IC - Power Management - DCDC SMPS - TI TPS62A01", Supplier Part Number 1=595-TPS62A01DRLR, Supplier 1=Mouser, Supplier 2="Texas Instruments", Supplier 3=Digi-Key, Supplier 4=Digi-Key, Supplier Part Number 2=TPS62A01DRLR, Supplier Part Number 3=296-TPS62A01DRLRCT-ND, Supplier Part Number 4=296-TPS62A01DRLRDKR-ND
Y1: library part OSC_MEMS_12MHZ_20PPM_XO, "12 MHz XO (Standard) HCMOS, LVCMOS Oscillator 3.3V 4-SMD, No Lead", Frequency=12MHz, Frequency Stability=20ppm, Input Voltage Max=3.63V, Input Voltage Min=2.97V, Manufacturer 1=SiTime, Manufacturer Lifecycle 1=Active, Max Temperature °C=70, Min Temperature °C=-20, Package/Case Manufacturer=4-QFN, Package/Case Standard=4-SMD, Supply Current=4.5mA, Full Item=Oscillator, Item=OSC, Manufacturer Part Number 1=SIT1602BC-31-33N-12.000000, Mounting Type=SMT, Name=OSC_MEMS_12MHZ_20PPM_XO, Output="HCMOS, LVCMOS", Resonator=MEMS, Type=XO

## Via types
v1: diameter 0.5, hole 0.3, Top Layer to Bottom Layer, tented both sides, 56 vias
v2: diameter 1.4, hole 1, Top Layer to Bottom Layer, tented both sides, 32 vias

## Nets (pads, with @x,y where several pads share a name; then routed paths per layer and width w, separated by ;. In a path a pad name is that pad's centre, name@x,y a point inside that pad or via, vN(x,y) a via of type N, cw(c..) or ccw(c..) an arc to the next point about the centre after c; other vN are vias at no path point)
1V1: C9.2 C10.2 C11.2 TP3.1 U2.23 U2.45 U2.50 | length 22.8
  Top Layer w0.2: -0.2,-5.5 U2.50 -0.2,-3.6 ; 0.6,-10.5 U2.23 0.6,-12.65 0.95,-13 C9.2 ; 1.5,-5.5 1.8,-5.2 1.8,-3.891 2.095,-3.595
  Top Layer w0.3: TP3.1 -2.8,-0.475 -1.675,-1.6 C11.2 ; C11.2@-1.5,-1.625 -0.2,-2.925 -0.2,-3.6 ; 2.095,-3.595 2.4,-3.291 C10.2
  Top Layer w0.4: -0.2,-5.5 1.5,-5.5 2,-6 2,-9.766 1.766,-10 1.1,-10 0.6,-10.5
2V048: C17.2 TP12.1 U2.43 U4.6 | length 10.3
  Top Layer w0.2: U2.43 3.635,-4.465 3.943,-4.157
  Top Layer w0.4: 3.943,-4.157 6.943,-4.157 TP12.1 8.9,-0.825 9.475,-0.25 U4.6
3V3: C1.2 C2.2 C3.2 C4.2 C5.2 C6.2 C7.2 C8.2 C12.1 C13.1 C16.1 C20.2 C21.2 C22.2 L1.2 R10.1 R13.2 TP1.1 U1.8 U2.1 U2.10 U2.22 U2.33 U2.42 U2.44 U2.48 U2.49 U4.4 Y1.4 | length 124.3
  Top Layer w0.2: C2.2 v1(-4.5,-8.9) U2.10 -2.671,-8.9 ; C1.2 v1(-4.5,-5.3) -2.671,-5.3 ; C3.2 -0.15,-13 0.2,-12.65 U2.22 0.2,-10.7 0,-10.5 ; 2.635,-8.9 U2.33 v1(4.5,-8.9) C4.2 5.1,-8.95 5.577,-9.427 8.973,-9.427 R13.2 ; 2.635,-5.373 2.562,-5.3 ; 3.124,-3.1 2.2,-4.024 U2.44 2.2,-4.938 2.562,-5.3 ; C5.2 v1(4.5,-5) 4.2,-5.3 U2.42 2.562,-5.3
  Top Layer w0.3: -4.2,7.9 C20.2 R10.1 ; 3.124,-3.1 v1(4.5,-3.1)
  Top Layer w0.4: -2.671,-5.3 -2.671,-8.718 -2.671,-8.9 -2.671,-10.266 -2.436,-10.5 0,-10.5 ; C8.2@0.125,-0.3 0,-0.425 C7.2 0,-1.75 0.05,-1.8 0.1,-1.8 0.4,-2.1 v1(0.4,-2.7) 0.4,-4.7 ; 2.635,-8.9 2.635,-5.373 ; C6.2 v1(4.5,-3.1) 4.5,1.6 6.1,3.2 8.075,3.2 8.9,2.375 C16.1 8.9,2.225 9.475,1.65 U4.4
  Top Layer w0.5: U1.8 -7.941,3.353 -7.976,3.353 -9.288,4.666 C12.1 -6.1,7.9 -4.2,7.9 -3.2,6.9 0.931,6.9 1.666,6.166 ; C8.2@0.125,-0.3 -0.025,-0.15 -0.852,0.677 -0.852,3.648 1.666,6.166 ; L1.2 4.6,12.3 C22.2 4.6,8.6 ; TP1.1 4.6,8.6 ; 1.666,6.166 2.966,6.166 4.375,7.575 4.45,7.575 4.6,7.725 C21.2 4.6,8.6
  Top Layer w0.6: C13.1 v1(-5.403,-15.919) -4.654,-15.919 -4.204,-15.469 Y1.4
  Bottom Layer w0.4: v1(-5.403,-15.919) -3.719,-15.919 v1@-0.019,-12.219
  Bottom Layer w0.5: v1(-4.5,-5.3) v1(-4.5,-8.9) 0.9,-8.9 2.1,-10.1 ; v1(0,-12.2) 2.1,-10.1 ; v1(0.4,-2.7) 0.8,-3.1 v1(4.5,-3.1) v1(4.5,-5) v1(4.5,-8.9) 3.3,-8.9 2.1,-10.1
5V: C19.1 C23.2 R12.2 U3.2 U3.7 U5.3 U5.4 | length 15.5
  Top Layer w0.3: R12.2 -0.925,9.6 -0.675,9.85 -0.675,9.925 0,10.6 0,12.9 ; U5.4 0,12.9 ; U3.2 0,21.75 U3.7 ; U5.3 0,12.9
  Top Layer w0.5: -0.8,13.1 C19.1 -0.8,16.3 0,17.1 0,18.7 0,21.6
CC1_PRG: J1.A5 R4.1 TP6.1 U2.41 | length 40.6
  Top Layer w0.2: U2.41 9.3,-5.7 17,2 TP6.1
  Top Layer w0.3: R4.1 TP6.1
  Bottom Layer w0.3: J1.A5 13.275,21.025 13.8,20.5 15.473,20.5 17,18.973 TP6.1
CC1_PWR: J2.A5 R6.1 TP17.1 U2.39 | length 85.2
  Top Layer w0.2: U2.39 11.5,-6.5 19,1 TP17.1
  Top Layer w0.3: R6.1 TP17.1
  Bottom Layer w0.3: J2.A5 -10.725,20.825 -10.1,20.2 -7.1,20.2 -6.2,21.1 -6.2,27.324 -4.924,28.6 17.9,28.6 19,27.5 TP17.1
CC2_PRG: J1.B5 R5.1 TP4.1 U2.40 | length 55.9
  Top Layer w0.2: U2.40 10.4,-6.1 18,1.5 TP4.1
  Top Layer w0.3: R5.1 TP4.1
  Bottom Layer w0.3: J1.B5 10.725,25.025 13.8,28.1 16.9,28.1 18,27 TP4.1 TP4.1@18,14.586
CC2_PWR: J2.B5 R7.1 TP15.1 U2.38 | length 86.3
  Top Layer w0.2: U2.38 12.6,-6.9 20,0.5 TP15.1
  Top Layer w0.3: R7.1 TP15.1
  Bottom Layer w0.3: J2.B5 -13.275,25.425 -9.6,29.1 18.9,29.1 20,28 TP15.1
CORE1_TX: U2.36
GND: C1.1 C2.1 C3.1 C4.1 C5.1 C6.1 C7.1 C8.1 C9.1 C10.1 C11.1 C12.2 C13.2 C14.1 C15.1 C16.2 C17.1 C18.1 C19.2 C21.1 C22.1 C23.1 J1.A1 J1.A12 J1.B1 J1.B12 J2.A1 J2.A12 J2.B1 J2.B12 R4.2 R5.2 R6.2 R7.2 R9.1 R11.2 TP2.1 U1.4 U2.19 U2.57 U3.1 U4.1 U4.2 U5.1 Y1.2 | length 25.2
  Top Layer w0.2: v1(-1.6,-12.8) -1,-12.2 U2.19
  Top Layer w0.3: U1.4 -9.156,-3.25 -9.05,-3.25 v1(-8.6,-3.7) ; v1(-1.596,22.25) U3.1 ; U5.1 0.915,11.9 1.077,11.738 1.462,11.738 v1(1.5,11.7)
  Top Layer w0.5: v1(-11,3) C12.2 ; v1(-6.7,-8.9) C2.1 ; v1(-6.7,-5.3) C1.1 ; v1(-5.2,18) R9.1 ; v1(-5.2,21.2) C14.1 ; v1(-4.9,15.5) R11.2 ; C11.1 v1(-1.6,0.7) ; C3.1 C9.1 ; C8.1 v1(0.2,2) ; C19.2 v1(1.5,15.4) ; v1(1,-2.3) C7.1 ; v1(2.3,7.8) C21.1 ; v1(2.3,9.4) C22.1 ; v1(3.4,-2.3) C10.1 ; C15.1 v1(5.2,21.2) ; C4.1 v1(6.7,-8.9) ; C5.1 v1(6.7,-5) ; C6.1 v1(6.7,-3.1) ; v1(6.6,-0.9) C17.1 ; v1(6.6,0.7) C18.1 ; v1(6.6,2.3) C16.2 ; U4.1 v1(13.762,-0.25) ; U4.2 v1(13.762,0.7) ; v1(13.1,13.1) R4.2 ; v1(14.1,14.7) R5.2 ; v1(15.1,16.3) R6.2 ; v1(16.1,17.9) R7.2
  Top Layer w0.6: C13.2 -4.654,-17.519 -4.204,-17.969 Y1.2
  other v1: -5.403,-17.519 -5.4,-15.2 0.4,-14 0.275,-9.925 -0.9,-9.9 -2,-9.8 -4.5,-9.6 4.5,-9.6 -2.025,-8.2 -2.025,-7.1 -2,-6.1 -5.2,-6 -0.7,-5.9 -1.5,-5.4 5.1,-2.4 1.4,20.1
NetC18_2: C18.2 U4.5 | length 1.4
  Top Layer w0.4: C18.2 U4.5
NetC20_1: C20.1 R10.2 R11.1 TP13.1 U5.5 | length 6.9
  Top Layer w0.3: TP13.1 -2.418,16.182 -2.418,15.682 R11.1 R10.2 C20.1 -2.5,12.4 U5.5
NetD1_1: D1.1 U5.6 | length 2.8
  Top Layer w0.3: D1.1 -2.583,10.13 -2.308,10.405 -2.235,10.405 -0.915,11.725 -0.915,11.9 U5.6
NetD1_2: D1.2 R12.1 | length 1.6
  Top Layer w0.3: D1.2 -2.578,8 R12.1
NetL1_1: L1.1 U5.2 | length 1.6
  Top Layer w0.6: 1.3,12.4 L1.1
NetR3_1: R3.1 U1.1 | length 2
  Top Layer w0.2: R3.1@-13.366,-2.034 -13.328,-2.034 U1.1
NetR8_2: R8.2 R9.2 U3.4 | length 4.3
  Top Layer w0.3: R9.2@-2.9,17.9 R9.2 R8.2 -2.05,19.6 -1.483,20.167 -1.483,20.182 -0.915,20.75 U3.4
PMUX_ST: R13.1 U2.37 U3.8 | length 64.1
  Top Layer w0.2: U2.37 8.1,-7.3 8.4,-7.6 R13.1
  Top Layer w0.3: U3.8 2.258,22.25 4.947,24.939 16.561,24.939 20.777,20.723 20.777,0.177 13,-7.6 R13.1
PWM0A: U2.27
PWM0B: U2.28
QSPI.C\S\: R3.2 U2.56 | length 10.2
  Top Layer w0.2: R3.2 -10.673,-4.527 -5.6,-4.527 -5.055,-4.527 -2.6,-4.527 U2.56
QSPI.SCLK: U1.6 U2.52 | length 11.7
  Top Layer w0.2: U1.6 -5.927,1.775 -5.525,1.775 -5.384,1.775 -5.237,1.922 -5.039,1.922 -4.742,1.625 -4.742,1.427 -4.742,1.229 -4.445,0.932 -4.247,0.932 -4.049,0.932 -3.752,0.635 -3.752,0.437 -4.933,-0.744 -4.933,-0.942 -4.636,-1.239 -4.438,-1.239 -4.24,-1.239 -4.1,-1.379 -4.1,-2.4 -3.751,-2.749 -3.68,-2.82 -2.017,-2.819 -1,-3.837 U2.52
QSPI.SD0: U1.5 U2.53 | length 11.7
  Top Layer w0.2: U1.5 -5.241,0.488 -5.5,0.229 -5.5,-0.885 -5.5,-1.86 -5.64,-2 -7.023,-2 -7.163,-2.14 -7.163,-2.56 -7.023,-2.7 -4.8,-2.7 -4.7,-2.8 -4.353,-3.146 -2.153,-3.146 -1.4,-3.899 U2.53
QSPI.SD1: U1.2 U2.55 | length 11.7
  Top Layer w0.2: U1.2 -11.061,-1.739 -11.3,-1.979 -11.3,-2.8 -9.9,-4.2 -3.3,-4.2 -2.9,-3.8 -2.424,-3.8 -2.2,-4.024 U2.55
QSPI.SD2: U1.3 U2.54 | length 11.6
  Top Layer w0.2: U1.3 -9.951,-2.249 -9.251,-2.249 -8.027,-3.473 -7.7,-3.473 -7.6,-3.473 -7.46,-3.333 -7.46,-3.167 -7.32,-3.027 -6.9,-3.027 -6.76,-3.167 -6.76,-3.733 -6.62,-3.873 -6.2,-3.873 -6.06,-3.733 -6.06,-3.167 -5.92,-3.027 -5.5,-3.027 -5.36,-3.167 -5.36,-3.333 -5.22,-3.473 -4,-3.473 -2.288,-3.473 -1.8,-3.962 U2.54
QSPI.SD3: U1.7 U2.51 | length 11.8
  Top Layer w0.2: U1.7 -6.861,2.461 -6.648,2.673 -6.601,2.625 -5.125,2.625 -4.5,2 -4.429,1.929 -4.231,1.929 -4.192,1.968 -3.994,1.968 -3.697,1.671 -3.697,1.473 -3.736,1.434 -3.736,1.236 -3.371,0.871 -3.3,0.8 -3.3,-1.8 -2.608,-2.492 -1.882,-2.492 -0.6,-3.774 U2.51
REF_EN: TP?.1 U2.35 U4.3 | length 16.6
  Top Layer w0.2: U2.35 v1(7.4,-8.1) ; v1(12.1,1.6) 12.125,1.625 13.037,1.625 U4.3
  Bottom Layer w0.2: v1(7.4,-8.1) 7.4,-5.559 9.08,-3.88 10.23,-2.73 10.98,-1.98 12.1,-0.859 v1(12.1,1.6)
RPD_N: R1.2 U2.46 | length 5.4
  Top Layer w0.2: U2.46 1.4,-3.07 1.832,-2.638 1.832,-1.093 1.998,-0.927 2.698,-0.927 3.325,-0.3 R1.2
RPD_P: R2.2 U2.47 | length 4.5
  Top Layer w0.2: U2.47 1,-3.007 1.505,-2.502 1.505,-0.595 R2.2
USBD_N: J1.A7 J1.B7 R2.1 TP8.1 | length 26.4
  Top Layer w0.381: R2.1 2.01,1.51 2.123,1.51 2.346,1.733 2.346,2.997 3.725,4.375 11.746,12.397 11.746,21.296 11.636,21.406 11.636,21.674 J1.A7
  Bottom Layer w0.381: J1.A7 11.636,21.796 11.636,22.202 12.243,22.809 12.243,22.816 12.425,22.999 J1.B7
USBD_P: J1.A6 J1.B6 R1.1 TP7.1 | length 26.4
  Top Layer w0.381: R1.1 3.19,1.51 3.077,1.51 2.854,1.733 2.854,2.787 3.884,3.816 4.034,3.966 12.254,12.187 12.254,21.296 12.364,21.406 12.364,21.674 J1.A6 12.364,21.796 12.364,22.202 11.757,22.809 11.757,22.816 11.575,22.999 J1.B6
VUSB_PRG: C15.2 J1.A4 J1.A9 J1.B4 J1.B9 TP5.1 U3.5 U3.6 | length 17.2
  Top Layer w0.3: U3.5 U3.6 1.55,21.25 1.6,21.2
  Top Layer w0.7: 1.6,21.2 C15.2 ; C15.2@2.9,21.275 5.937,24.312 9.875,24.312 ; J1.B4 9.875,24.312 ; J1.B9 14.125,23.59 13.403,24.312 9.875,24.312
VUSB_PWR: C14.2 J2.A4 J2.A9 J2.B4 J2.B9 R8.1 TP16.1 U3.3 | length 19
  Top Layer w0.3: -1.6,21.2 -1.55,21.25 U3.3
  Top Layer w0.5: R8.1@-4.4,19.6 -4.4,19.775 -4.35,19.825 -4.2,19.825 -2.9,21.125 C14.2
  Top Layer w0.7: J2.B4 -14.125,23.59 -13.403,24.312 -9.875,24.312 ; J2.B9 -9.875,24.312 ; C14.2 -2,21.2 -1.6,21.2 ; C14.2@-2.9,21.275 -5.062,23.437 -5.937,24.312 -9.875,24.312
XIN: TP9.1 U2.20 Y1.3 | length 7
  Top Layer w0.2: U2.20 -0.6,-12.558 -2.004,-13.962 Y1.3 -0.553,-16.9 TP9.1@-0.3,-16.9
pads on no net: B1.1 J1.A8 J1.B8 J1.M1 J1.M2 J1.M3 J1.M4 J2.A6 J2.A7 J2.A8 J2.B6 J2.B7 J2.B8 J2.M1 J2.M2 J2.M3 J2.M4 U1.9 U2.2 U2.3 U2.4 U2.5 U2.6 U2.7 U2.8 U2.9 U2.11 U2.12 U2.13 U2.14 U2.15 U2.16 U2.17 U2.18 U2.21 U2.24 U2.25 U2.26 U2.29 U2.30 U2.31 U2.32 U2.34 Y1.1
copper on no net:
  other v2: -25,-27.9 25,-27.9 -27.051,-27.051 -22.949,-27.051 22.949,-27.051 27.051,-27.051 -27.9,-25 -22.1,-25 22.1,-25 27.9,-25 -27.051,-22.949 -22.949,-22.949 22.949,-22.949 27.051,-22.949 -25,-22.1 25,-22.1 -25,22.1 25,22.1 -27.051,22.949 -22.949,22.949 22.949,22.949 27.051,22.949 -27.9,25 -22.1,25 22.1,25 27.9,25 -27.051,27.051 -22.949,27.051 22.949,27.051 27.051,27.051 -25,27.9 25,27.9

## Polygon pours and split planes (outlines as drawn)
GND on Top Layer "GND_L01_P000" (solid, pour order 0): -2.5,-5.1 -2.5,-10.4 2.2,-10.4 2.2,-5.1
GND on Bottom Layer "NONET_L02_P013" (solid, shelved, pour order 13): -30,30 -30,-30 30,-30 30,30

## Silkscreen, mask and mechanical layers (free items; w line width, h text height)
Top Overlay:
  text "3V3" at -12.597,7.5 h3